# Altium PCB PCB1_1.pcbdoc
Units mil, origin at the board's own origin, x right, y up, seen from the top; angles counter-clockwise.
Board outline 3006.59 x 1637.5 mil, 4 copper layers (Top Layer, Inner1, Inner2, Bottom Layer); 46 components, 49 nets, 208 pads, 87 vias.
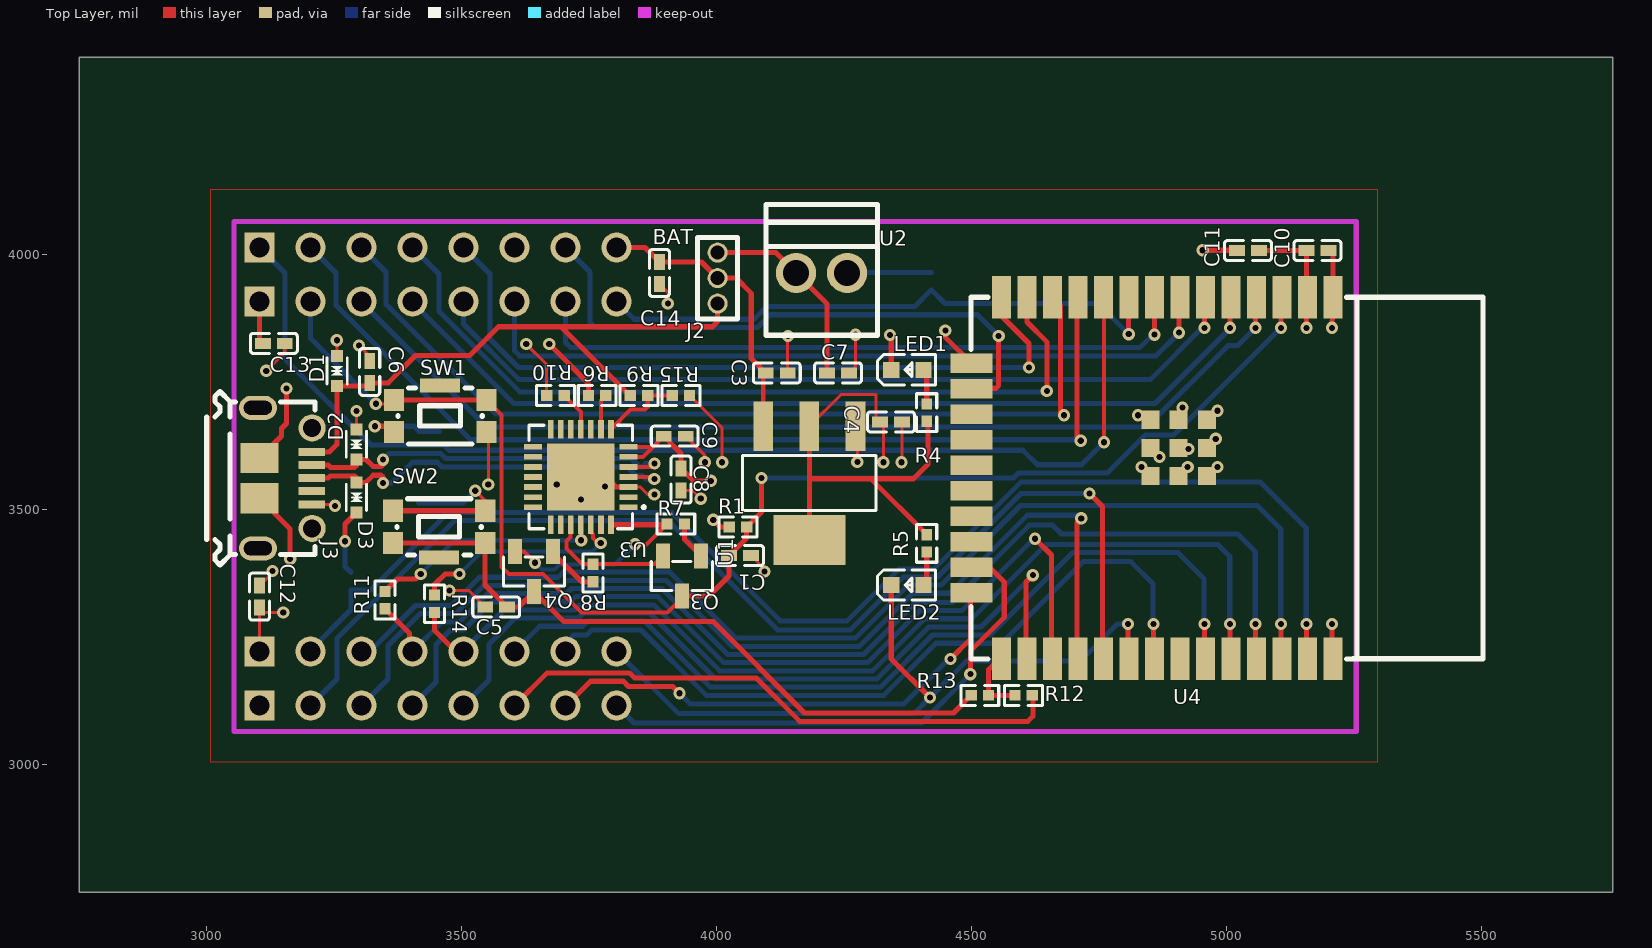
[diagram p0: Top Layer view]
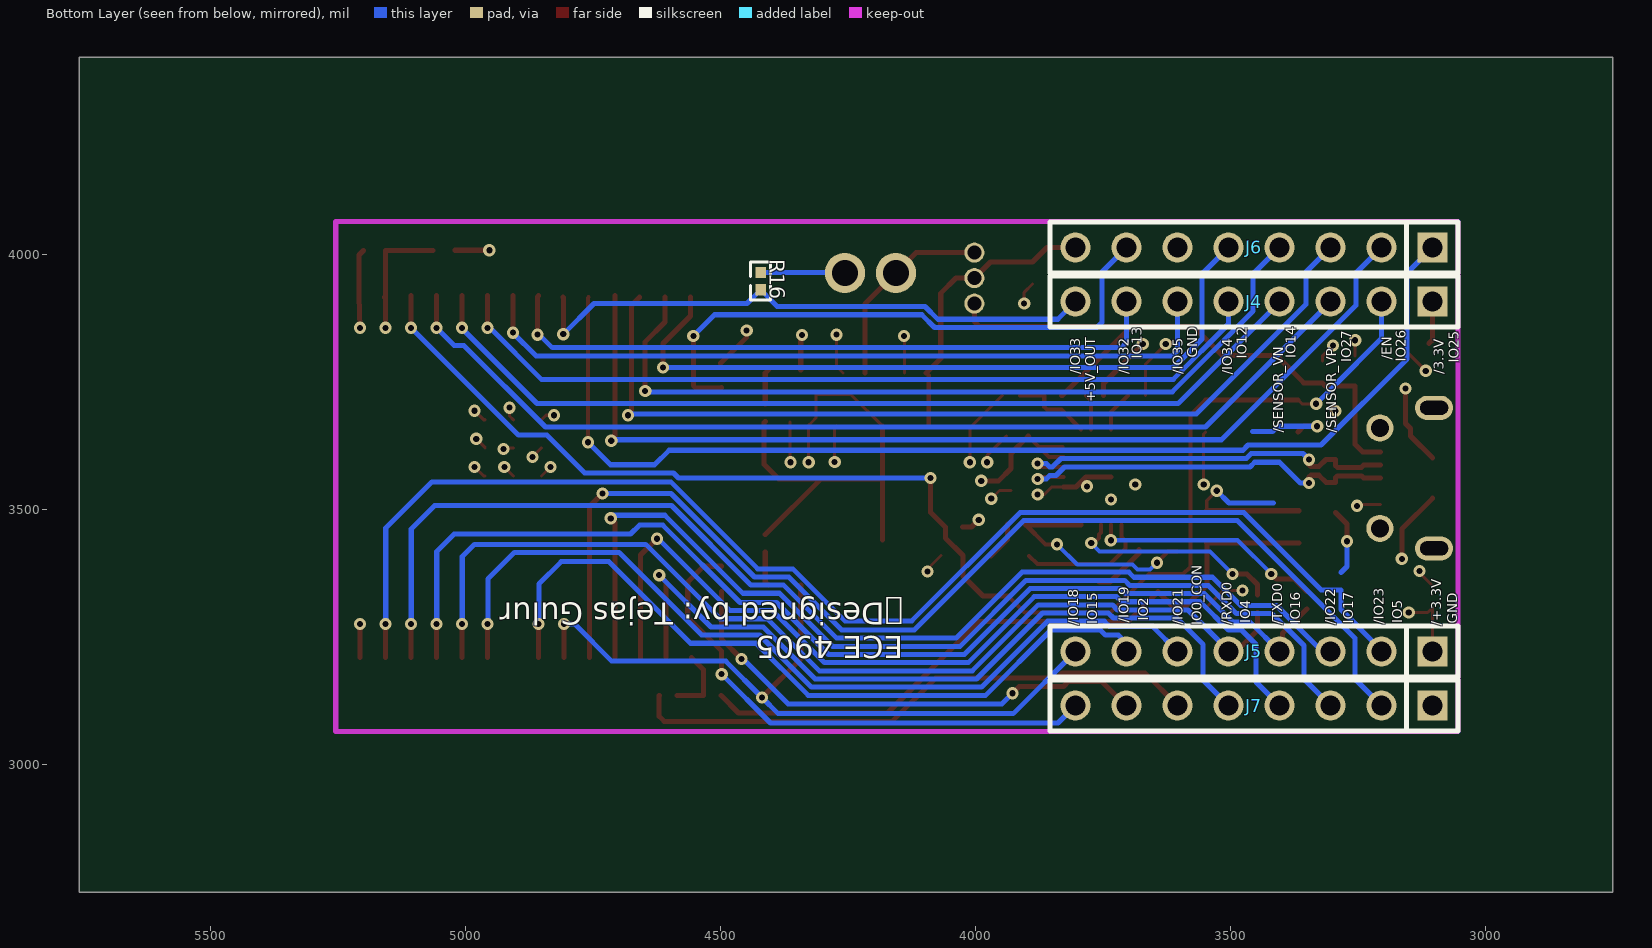
[diagram p1: Bottom Layer view, seen from below]

## Layer stack, top to bottom
Top Layer: signal copper (thickness not stored)
Dielectric: dielectric 12.6, FR-4, Dk 4.8
Inner1: signal copper (thickness not stored)
Dielectric: dielectric 12.6, FR-4, Dk 4.8
Inner2: signal copper (thickness not stored)
Dielectric: dielectric 12.6, FR-4, Dk 4.8
Bottom Layer: signal copper (thickness not stored)

## Board outline
5756.59,2750 2750,2750 2750,4387.5 5756.59,4387.5

## Components (designator, comment, footprint, x,y, rotation, side; value= is the part's Value field where it differs from the comment)
C1 "CL05B104KO5NNNC" C0402_NEW 4045.54,3410.5 r180 top
C3 "CL05A106MP5NUNC_C315248" C0402 4117.54,3768.5 r180 top
C4 "CL05A106MP5NUNC_C315248" C0402 4341.54,3672.5 r180 top
C5 "CL05B104KO5NNNC" C0402_NEW 3567.54,3309.5 r0 top
C6 "CL05B104KO5NNNC" C0402_NEW 3319.54,3770.5 r270 top
C7 "CL05A106MP5NUNC_C315248" C0402 4237.54,3768.5 r180 top
C8 "CL05A475KP5NRNC" C0402 3930.04,3559.5 r270 top
C9 "CL05B104KO5NNNC" C0402_NEW 3917.54,3644.5 r0 top
C10 "CL05A475KP5NRNC" C0402 5177.54,4008.5 r180 top
C11 "CL05B104KO5NNNC" C0402_NEW 5041.54,4008.5 r0 top
C12 "CL05B104KO5NNNC" C0402_NEW 3103.54,3330 r270 top
C13 "CL05B104KO5NNNC" C0402_NEW 3131.54,3826.5 r180 top
C14 "CL05B104KO5NNNC" C0402_NEW 3887.54,3964.5 r90 top
D1 "LESD5D5.0CT1G" SOD-523_L1.2-W0.8-LS1.6-BI 3255.54,3772.5 r270 top
D2 "LESD5D5.0CT1G" SOD-523_L1.2-W0.8-LS1.6-BI 3293.54,3628.5 r270 top
D3 "LESD5D5.0CT1G" SOD-523_L1.2-W0.8-LS1.6-BI 3293.54,3524.5 r90 top
J2 "B-2101S03P-A110" HDR-TH_3P-P1.27-V-M-1 4001.54,3954.5 r270 top
J3 "1050170001" MICRO-USB-SMD_105017-0001 3153.54,3562.2 r270 top
J4 "KH-2.54PH180-1X8P-L11.5" HDR-TH_8P-P2.54-V-M 3453.54,3908.5 r0 bottom
J5 "KH-2.54PH180-1X8P-L11.5" HDR-TH_8P-P2.54-V-M 3453.54,3222.5 r0 bottom
J6 "KH-2.54PH180-1X8P-L11.5" HDR-TH_8P-P2.54-V-M 3453.54,4014.5 r0 bottom
J7 "KH-2.54PH180-1X8P-L11.5" HDR-TH_8P-P2.54-V-M 3453.54,3116.5 r0 bottom
LED1 "LTST-C193KGKT-5A" LED0603-RD 4373.54,3774.5 r0 top
LED2 "LTST-C191KRKT" LED0603-RD 4373.54,3352.5 r0 top
Q3 "SS8050-G" SOT-23-3_L2.9-W1.3-P1.90-LS2.4-BR 3931.54,3370.5 r90 top
Q4 "SS8050-G" SOT-23-3_L2.9-W1.3-P1.90-LS2.4-BR 3641.54,3379 r90 top
R1 "0402WGF1002TCE" R0402 4041.54,3466.5 r180 top
R4 "0402WGJ0512TCE" R0402 4411.54,3690.5 r270 top
R5 "0402WGJ0561TCE" R0402 4411.54,3434.5 r90 top
R6 "0402WGF1001TCE" R0402 3765.54,3724.5 r180 top
R7 "0402WGF1002TCE" R0402 3919.54,3472.5 r0 top
R8 "0402WGF1002TCE" R0402 3757.54,3376.5 r270 top
R9 "0402WGF2212TCE" R0402 3847.54,3724.5 r0 top
R10 "0402WGF1002TCE" R0402 3683.54,3724.5 r180 top
R11 "0402WGF0000TCE" R0402 3349.54,3323 r90 top
R12 "0402WGF220JTCE" R0402 4601.54,3136.5 r180 top
R13 "0402WGF220JTCE" R0402 4515.54,3136.5 r0 top
R14 "0402WGF0000TCE" R0402 3446.54,3316 r90 top
R15 "0402WGF4752TCE" R0402 3929.54,3724.5 r180 top
R16 "0402WGF8200TCE" R0402 4420.54,3948.5 r270 bottom
SW1 "KMR221GLFS" KEY-SMD_KMR2XXGXXX 3457.54,3698.5 r0 top
SW2 "KMR221GLFS" KEY-SMD_KMR2XXGXXX 3455.54,3452.5 r180 top
U1 "AMS1117-3.3_C347222" SOT-223-4_L6.5-W3.5-P2.30-LS7.0-BR 4181.54,3552.5 r90 top
U2 "XY308-2.54-2P" CONN-TH_XY308-2.54-2P 4205.54,3964.5 r0 top
U3 "CP2102N-A02-GQFN28R" QFN-28_L5.0-W5.0-P0.50-TL-EP3.3 3733.54,3564.5 r180 top
U4 "ESP32-WROOM-32E-N16_C701343" WIFI-SMD_ESP32-WROOM-32E 4853.54,3562.5 r180 top

## Footprints (in the part's own frame and the unit in brackets; to place one, negate y for a bottom-side part, rotate by r counter-clockwise, add the part's x,y. Pads: shape width x height; smd on the part's side, far side on the other; paste and mask are expansions set on the pad)
C0402 [mm]
  rect 0.79x0.54 smd: 1(-0.545,0) 2(0.545,0)
  silkscreen extent -1.17,-0.5 1.17,0.5
C0402_NEW [mm]
  rect 0.79x0.54 smd: 1(-0.545,0) 2(0.545,0)
  silkscreen extent -1.17,-0.5 1.17,0.5
CONN-TH_XY308-2.54-2P [mm]
  round 2 hole 1.3: 1(-1.27,0) 2(1.27,0)
  silkscreen extent -2.78,-3.1 2.78,3.4
HDR-TH_3P-P1.27-V-M-1 [mm]
  round 1 hole 0.7: 1(-1.27,0) 2(0,0) 3(1.27,0)
  silkscreen extent -2.03,-1 2.03,1
HDR-TH_8P-P2.54-V-M [mm]
  rect 1.5x1.5 hole 1: 1(-8.89,0)
  round 1.5 hole 1: 2(-6.35,0) 3(-3.81,0) 4(-1.27,0) 5(1.27,0) 6(3.81,0) 7(6.35,0) 8(8.89,0)
  silkscreen extent -10.16,-1.27 10.16,1.27
KEY-SMD_KMR2XXGXXX [mm]
  rect 1x1.1 smd: 1(-2.3,0.438) 2(2.3,0.438) 3(-2.3,-1.162) 4(2.3,-1.162)
  rect 2x0.7 smd: 5(0,1.162)
  silkscreen extent -2.1,-1.76 2.1,1.04
LED0603-RD [mm]
  rect 0.8x0.8 smd: 1(-0.799,-0.003) 2(0.799,0.003)
  silkscreen extent -1.49,-0.75 1.39,0.76
MICRO-USB-SMD_105017-0001 [mm]
  rect 0.4x1.3 smd: 1(-1.3,1.33) 2(-0.65,1.33) 3(0,1.33) 4(0.65,1.33) 5(1.3,1.33)
  round 1.35 hole 0.9: 6(-2.5,1.35) 7(2.5,1.35)
  oval 1.2x1.9 hole 0.7 slot 1.4 at 90 deg: 8(3.5,-1.35) 9(-3.5,-1.35)
  rect 1.5x1.9 smd: 10(-1,-1.28) 10(1,-1.28)
  silkscreen extent -4.32,-3.9 4.32,1.5
QFN-28_L5.0-W5.0-P0.50-TL-EP3.3 [mm]
  rect 0.905x0.28 smd: 1(-2.377,1.5) 2(-2.377,1) 3(-2.377,0.5) 4(-2.377,0) 5(-2.377,-0.5) 6(-2.377,-1) 7(-2.377,-1.5) 15(2.377,-1.5) 16(2.377,-1) 17(2.377,-0.5) 18(2.377,0) 19(2.377,0.5) 20(2.377,1) 21(2.377,1.5)
  rect 0.28x0.905 smd: 8(-1.5,-2.377) 9(-1,-2.377) 10(-0.5,-2.377) 11(0,-2.377) 12(0.5,-2.377) 13(1,-2.377) 14(1.5,-2.377) 22(1.5,2.377) 23(1,2.377) 24(0.5,2.377) 25(0,2.377) 26(-0.5,2.377) 27(-1,2.377) 28(-1.5,2.377)
  rect 3.35x3.35 smd: 29(0,0)
  silkscreen extent -3.2,-2.58 2.58,2.58
R0402 [mm]
  rect 0.566x0.54 smd: 1(-0.433,0) 2(0.433,0)
  silkscreen extent -0.94,-0.5 0.94,0.5
SOD-523_L1.2-W0.8-LS1.6-BI [mm]
  rect 0.6x0.6 smd: 1(-0.75,0) 2(0.75,0)
  silkscreen extent -0.65,-0.5 0.65,0.5
SOT-23-3_L2.9-W1.3-P1.90-LS2.4-BR [mm]
  rect 1.25x0.7 smd: 1(1,-0.95) 2(1,0.95) 3(-1,0)
  silkscreen extent -0.73,-1.53 0.73,1.53
SOT-223-4_L6.5-W3.5-P2.30-LS7.0-BR [mm]
  rect 2.47x0.98 smd: 1(2.835,-2.3) 2(2.835,0) 3(2.835,2.3)
  rect 2.47x3.6 smd: 4(-2.835,0)
  silkscreen extent -1.37,-3.33 1.37,3.33
WIFI-SMD_ESP32-WROOM-32E [mm]
  rect 0.95x2.1 smd: 1(-9.003,-9) 2(-7.733,-9) 3(-6.463,-9) 4(-5.193,-9) 5(-3.923,-9) 6(-2.653,-9) 7(-1.383,-9) 8(-0.113,-9) 9(1.157,-9) 10(2.427,-9) 11(3.697,-9) 12(4.967,-9) 13(6.237,-9) 14(7.507,-9) 25(7.507,9) 26(6.237,9) 27(4.967,9) 28(3.697,9) 29(2.427,9) 30(1.157,9) 31(-0.113,9) 32(-1.383,9) 33(-2.653,9) 34(-3.923,9) 35(-5.193,9) 36(-6.463,9) 37(-7.733,9) 38(-9.003,9)
  rect 2.1x0.95 smd: 15(9.003,-5.715) 16(9.003,-4.445) 17(9.003,-3.175) 18(9.003,-1.905) 19(9.003,-0.635) 20(9.003,0.635) 21(9.003,1.905) 22(9.003,3.175) 23(9.003,4.445) 24(9.003,5.715)
  rect 0.9x0.9 smd: 39(-2.722,-0.1) 39(-2.722,-2.9) 39(-2.722,-1.5) 39(-1.322,-0.1) 39(-1.322,-1.5) 39(-1.322,-2.9) 39(0.078,-0.1) 39(0.078,-1.5) 39(0.078,-2.9)
  silkscreen extent -16.48,-9 9.02,9.02

## Via types
v1: diameter 24.02, hole 12.01, Top Layer to Bottom Layer, 87 vias

## Nets (pads, with @x,y where several pads share a name; then routed paths per layer and width w, separated by ;. In a path a pad name is that pad's centre, name@x,y a point inside that pad or via, vN(x,y) a via of type N, cw(c..) or ccw(c..) an arc to the next point about the centre after c; other vN are vias at no path point)
$1N8813: R6.1 U3.9 | length 70.4
  Top Layer w8: U3.9 3772.91,3714.83 R6.1
$1N8814: R10.1 U3.11 | length 80.1
  Top Layer w8: R10.1 3733.54,3691.54 U3.11
$1N8818: R9.2 R15.2 U3.8 | length 160.9
  Top Layer w8: U3.8 3830.99,3696.5 3859.54,3696.5 3864.58,3701.54 R9.2 R15.2
$1N8830: U3.27
$1N8848: Q3.1 R7.2 | length 76
  Top Layer w10: R7.2 3936.58,3442.23 Q3.1
$1N8884: LED1.2 R4.1 | length 69.8
  Top Layer w10: LED1.2 4411.54,3768.11 R4.1
$1N8888: LED2.2 R5.1 | length 67.5
  Top Layer w10: LED2.2 4411.54,3359.16 R5.1
$1N38866: Q4.1 R8.2 | length 109.2
  Top Layer w10: Q4.1@3678.94,3421.87 3678.94,3415.1 3735.54,3358.5 3756.58,3358.5 R8.2
+3.3V: C4.2 C8.1 C9.1 C10.2 C11.2 C12.2 C13.2 J4.1 J5.1 R1.2 R4.2 R5.2 R6.2 U1.2 U1.4 U3.6 U3.7 U4.2 | length 1917.7
  Top Layer w6: J5.1 C12.2 3113.08,3299 v1(3150.04,3299) ; U1.2 4243.43,3726 4312.04,3726 4312.04,3680.54 C4.2 4326.54,3666.04 v1(4326.54,3593.5)
  Top Layer w8: U3.6 3855.45,3603.87 3875.14,3623.56 ; U3.7@3829.14,3623.56 3875.14,3623.56 ; C9.1 3875.14,3623.56
  Top Layer w10: J4.1 3103.54,3833.04 C13.2 ; v1(3671.54,3825) 3748.5,3748.04 R6.2 ; C9.1 3930.04,3610.54 C8.1 3954,3557 v1(3988.04,3557) ; v1(3993.04,3480.5) 4007.04,3466.5 R1.2 ; U1.4 4181.54,3561.12 ; U1.2 4181.54,3561.12 ; R5.2 4301.96,3561.12 ; R4.2 4414.04,3670.96 4414.04,3589.5 4385.67,3561.12 4301.96,3561.12 ; C11.2 C10.2 U4.2@5156.08,3918.84 ; v1(5155.97,3856.93) U4.2@5156.08,3918.84 ; U4.2 5156.08,3918.72 U4.2@5156.08,3918.84 ; 4181.54,3561.12 4301.96,3561.12
+5V: C3.2 C14.2 J2.2 J6.8 U1.3 | length 575.6
  Top Layer w8: U1.3 4090.99,3763.41 C3.2
  Top Layer w10: J6.8 3859,4014.5 C14.2 3970.08,3985.96 J2.2 4037.54,3954.5 4067.54,3924.5 4067.54,3797.04 C3.2
+5V_BAT: C7.2 J2.1 U2.1 | length 391.6
  Top Layer w10: J2.1 4115.54,4004.5 U2.1 4216.08,3903.96 C7.2
+5V_VBUS: C6.2 D1.2 J2.3 J3.1 R9.1 | length 1195.5
  Top Layer w10: J3.1 3240.42,3613.38 3255.54,3628.5 D1.2 3313.48,3742.97 C6.2 3356.08,3749.04 3409.54,3802.5 3515.54,3802.5 3572.04,3859 3694.8,3859 ; R9.1 3829.3,3724.5 3694.8,3859 ; J2.3 4001.54,3869 3991.54,3859 3694.8,3859
DTR: Q4.2 R7.1 U3.28 | length 458.5
  Top Layer w8: Q4.2 3621.67,3418.37 v1(3643.54,3396.5) ; v1(3839.54,3432.5) 3862.5,3432.5 R7.1@3900.9,3470.9
  Top Layer w10: U3.28 3900.9,3470.9 R7.1
  Bottom Layer w8: v1(3643.54,3396.5) 3657.16,3382.88 3681.93,3382.88 3691.93,3392.88 3799.93,3392.88 v1(3839.54,3432.5)
EN: C1.2 J4.2 Q3.3 R1.1 SW1.1 SW1.2 U4.3 | length 2745.5
  Top Layer w6: v1(3331.54,3708) 3359.24,3708 SW1.1
  Top Layer w8: SW1.2@3548.79,3715.75 3578.11,3686.44 3578.11,3388.44 3592.31,3374.24 3659.46,3374.24 3734.7,3299 3902.91,3299 Q3.3@3931.54,3327.63
  Top Layer w10: SW1.1 SW1.2 ; Q3.3 3984.67,3331.13 4024.08,3370.54 C1.2 4058.58,3445 R1.1 4087.54,3495.46 v1(4087.54,3562.5) ; v1(5105.97,3856.93) U4.3@5105.97,3919.84
  Bottom Layer w10: J4.2 3203.54,3836.5 3251.54,3788.5 3251.54,3788 v1(3331.54,3708) ; v1(4087.54,3562.5) 4581.66,3562.5 4591.66,3572.5 4765.54,3572.5 4839.54,3646.5 4895.54,3646.5 v1(5105.97,3856.93)
GND: C1.1 C3.1 C4.1 C5.1 C6.1 C7.1 C8.2 C9.2 C10.1 C11.1 C12.1 C13.1 C14.1 D1.1 D2.1 D3.1 J3.5 J3.6 J3.7 J3.8 J3.9 J3.10 J6.6 J7.1 LED1.1 R10.2 R15.1 R16.1 SW1.3 SW1.4 SW2.3 SW2.4 U1.1 U2.2 U3.3 U3.29 U4.1 U4.15 U4.38 U4.39 | length 3184.2
  Top Layer w6: C12.1 3129.04,3376.96 v1(3129.04,3380) ; v1(3116.78,3772.67) 3153,3808.89 C13.1 ; J3.5 3248.54,3511 v1(3251.54,3508) ; v1(3255.04,3832.5) 3255.54,3832 D1.1 ; D2.1 v1(3293.54,3694) ; v1(3298.54,3822.5) 3319.54,3801.5 C6.1 ; v1(3476.04,3342) 3513.58,3342 C5.1 ; v1(3526.54,3537.5) 3546.09,3517.95 SW2.3 ; SW1.4 3552.09,3648.75 v1@3552.09,3550.05 ; v1(3626.54,3825) 3666.5,3785.04 R10.2 ; U3.3 3850.02,3544.82 3864.54,3530.31 v1(3877.54,3530.31) ; C14.1 3904.04,3926.54 v1(3904.04,3904.5) ; C8.2 3952.5,3538.04 v1(3968.54,3522) ; C9.2 3976.54,3606.96 v1(3976.54,3593.5) ; R15.1 4010.54,3660.54 v1(4010.54,3593.5) ; C1.1 4093.54,3383.96 v1(4093.54,3379) ; C3.1 4139,3840.46 v1(4139.54,3841) ; C7.1 4272.04,3781.54 v1(4272.04,3843.5) ; U1.1 4275.54,3660.66 v1(4275.54,3594) ; v1(4362.14,3593.5) 4363,3594.37 C4.1 ; v1(4825.54,3685.5) 4841.63,3685.5 U4.39@4850.45,3676.68 ; v1(4832.62,3584.15) 4832.73,3584.15 U4.39@4850.45,3566.43 ; U4.39@4850.45,3621.55 4868.05,3603.95 v1(4868.05,3603.83) ; U4.39@4905.57,3566.43 4923.17,3584.03 v1(4923.17,3584.15) ; U4.39@4905.57,3621.57 4922.48,3621.57 v1(4924.54,3619.5) ; U4.39@4905.57,3676.68 4913.04,3684.14 v1(4913.04,3700.5) ; U4.39@4960.69,3566.43 4963.78,3566.43 v1(4981.5,3584.15) ; U4.39@4960.69,3621.55 4978.29,3639.15 v1(4978.29,3639.27) ; U4.39@4960.69,3676.68 4963.78,3676.68 v1(4981.5,3694.39)
  Top Layer w10: J3.10@3103.15,3522.83 3163.54,3462.44 v1(3163.54,3404) ; J3.10@3103.15,3601.57 3146.54,3644.96 3146.54,3659.5 3156.54,3669.5 v1(3156.54,3738) ; v1(3271.04,3438.5) 3271.04,3472.47 D3.1 ; v1(3329.54,3664) 3355.74,3664 SW1.3 ; SW2.4 SW2.3 ; U3.29 3782.65,3564.5 3802.33,3544.82 U3.3 ; v1(4339.54,3843) 4342.07,3840.47 LED1.1 ; v1(4448.04,3851.5) 4448.04,3838.57 U4.15 ; v1(4952.54,4009) 5019.58,4009 C11.1 ; C10.1 5207.97,3999.53 U4.1@5207.97,3918.84 ; U4.38@5205.97,3211.16 v1(5205.97,3276.07) ; v1(5205.97,3856.93) U4.1@5207.97,3918.84 ; U4.1 U4.1@5207.97,3918.84
  Bottom Layer w10: v1(3271.04,3438.5) 3271.04,3389.04 3283.04,3377.04 ; v1(3329.54,3664) 3406.45,3664 3416.86,3653.59 3456.23,3653.59 ; 3415.36,3513.41 3502.45,3513.41 v1(3526.54,3537.5) ; U2.2 4256.58,3965.54 R16.1
  other v1: 3733.54,3520.17 3780.74,3546.19 3552.04,3550 3686.34,3549.83
IO0: R12.2 R13.2 U4.25 | length 135.3
  Top Layer w10: U4.25@4555.97,3210.16 4532.58,3186.78 R13.2 R12.2
IO0_BTN: C5.2 Q4.3 R13.1 SW2.1 SW2.2 | length 1359.8
  Top Layer w10: SW2.2 SW2.1 3545.54,3434.7 3545.54,3352.96 C5.2 3611.41,3309.5 Q4.3 3700.17,3281 3993.04,3281 4172.04,3102 4464,3102 R13.1
IO0_CON: J7.6 R12.1 | length 1127.4
  Top Layer w10: J7.6 3667.54,3180.5 3829.04,3180.5 3839.04,3170.5 4077.54,3170.5 4162.54,3085.5 4609.54,3085.5 4619.54,3095.5 4619.54,3135.54 R12.1
IO2: J7.7 U4.24 | length 977.2
  Top Layer w10: J7.7 3705.04,3116.5 3752.54,3164 3817.04,3164 3827.04,3154 3913.54,3154 v1(3927.04,3140.5) ; v1(4458.04,3207.5) 4497.11,3246.57 U4.24@4497.11,3339.49
  Bottom Layer w10: v1(3927.04,3140.5) 3948.04,3119.51 4366.55,3119.51 4454.54,3207.5 v1(4458.04,3207.5)
IO4: J7.5 U4.26 | length 1536.5
  Top Layer w10: U4.26@4605.97,3211.16 4605.97,3358.43 v1(4619.54,3372)
  Bottom Layer w10: J7.5 3553.54,3166.5 3553.54,3236.5 3604.93,3287.88 3728.93,3287.88 3738.93,3297.88 3868.16,3297.88 3997.54,3168.5 4313.54,3168.5 4415.54,3270.5 4518.04,3270.5 v1(4619.54,3372)
IO5: J7.2 U4.29 | length 2254.9
  Top Layer w10: v1(4730.54,3532) 4755.97,3506.57 U4.29@4755.97,3211.16
  Bottom Layer w10: J7.2 3255.54,3168.5 3255.54,3248.5 3485.91,3478.87 3905.17,3478.87 4119.54,3264.5 4261.54,3264.5 4365.54,3368.5 4432.92,3368.5 4596.42,3532 v1(4730.54,3532)
IO12: J6.5 U4.14 | length 1441
  Top Layer w10: U4.14 4557.97,3880.07 4612.04,3826 v1(4612.04,3779)
  Bottom Layer w10: J6.5 3555.54,3962.5 3555.54,3834.86 3611.41,3779 v1(4612.04,3779)
IO13: J6.7 U4.16 | length 1158.5
  Top Layer w10: U4.16@4497.11,3739.49 4498.11,3738.5 4547.54,3738.5 4552.54,3743.5 v1(4552.54,3841)
  Bottom Layer w10: J6.7 3751.54,3966.5 3751.54,3867.82 3761.54,3857.82 4078.97,3857.82 4080.91,3859.75 4079.9,3857.82 4104.59,3882.5 4511.04,3882.5 v1(4552.54,3841)
IO14: J6.4 U4.13 | length 1604.1
  Top Layer w10: U4.13 4607.97,3868.5 4647.04,3829.43 v1(4647.04,3733)
  Bottom Layer w10: J6.4 3455.54,3962.5 3455.54,3889.61 3613.66,3731.49 4645.54,3731.49 v1(4647.04,3733)
IO15: J7.8 U4.23 | length 1034.6
  Top Layer w10: v1(4497.04,3178) 4497.04,3222.83 4563.54,3289.33 4563.54,3358.5 4532.55,3389.49 U4.23@4497.11,3389.49
  Bottom Layer w10: J7.8 3837.74,3082.3 4401.34,3082.3 v1(4497.04,3178)
IO16: J7.4 U4.27 | length 1753
  Top Layer w10: v1(4624.04,3443.5) 4655.97,3411.57 U4.27@4655.97,3210.16
  Bottom Layer w10: J7.4 3449.54,3162.5 3449.54,3236.36 3477.69,3264.5 3503.54,3264.5 3558.93,3319.88 3712.93,3319.88 3722.93,3329.88 3884.16,3329.88 4013.54,3200.5 4295.54,3200.5 4397.54,3302.5 4480.38,3302.5 4621.38,3443.5 v1(4624.04,3443.5)
IO17: J7.3 U4.28 | length 1989.4
  Top Layer w10: U4.28@4705.97,3211.16 4705.97,3474.93 v1(4714.54,3483.5)
  Bottom Layer w10: J7.3 3355.54,3168.5 3355.54,3234.04 3418,3296.5 3487.54,3296.5 3542.93,3351.88 3696.93,3351.88 3706.93,3361.88 3900.16,3361.88 4029.54,3232.5 4279.54,3232.5 4383.54,3336.5 4455.54,3336.5 4608.54,3489.5 4708.54,3489.5 v1(4714.54,3483.5)
IO18: J5.8 LED2.1 U4.30 | length 1442.1
  Top Layer w10: LED2.1 4342.07,3207.89 v1(4417.75,3132.21) ; U4.30@4805.97,3211.16 v1(4805.97,3276.07)
  Bottom Layer w10: J5.8 3925.54,3100.5 4386.04,3100.5 v1(4417.75,3132.21) 4489.05,3203.51 4712.55,3203.51 4785.11,3276.07 v1(4805.97,3276.07)
IO19: J5.7 U4.31 | length 1502.1
  Top Layer w10: U4.31@4855.97,3211.16 v1(4855.97,3276.07)
  Bottom Layer w10: J5.7 3703.54,3238.5 3719.54,3254.5 3744.92,3254.5 3754.92,3264.5 3851.54,3264.5 3979.54,3136.5 4327.54,3136.5 4429.54,3238.5 4558.04,3238.5 4718.04,3398.5 4811.54,3398.5 4855.54,3354.5 4855.54,3276.5 v1(4855.97,3276.07)
IO21: J5.6 U4.33 | length 1720.2
  Top Layer w10: U4.33@4955.97,3211.16 v1(4955.97,3276.07)
  Bottom Layer w10: J5.6 3652.93,3271.88 3736.93,3271.88 3746.93,3281.88 3858.16,3281.88 3987.54,3152.5 4320.92,3152.5 4422.92,3254.5 4421.19,3252.15 4423.54,3254.5 4536.04,3254.5 4698.04,3416.5 4903.54,3416.5 4955.54,3364.5 4955.54,3276.5 v1(4955.97,3276.07)
IO22: J5.3 U4.36 | length 2298.2
  Top Layer w10: U4.36@5105.97,3211.16 v1(5105.97,3276.07)
  Bottom Layer w10: J5.3 3319.54,3222.5 3409.54,3312.5 3479.54,3312.5 3534.93,3367.88 3688.93,3367.88 3698.93,3377.88 3908.16,3377.88 4037.54,3248.5 4271.54,3248.5 4375.54,3352.5 4439.54,3352.5 4595.54,3508.5 5059.54,3508.5 5105.54,3462.5 5105.54,3276.5 v1(5105.97,3276.07)
IO23: J5.2 U4.37 | length 2580.7
  Top Layer w10: U4.37@5155.97,3211.16 v1(5155.97,3276.07)
  Bottom Layer w10: J5.2 3203.54,3225 3283.04,3304.5 3283.04,3342.96 3321.5,3342.96 3473.41,3494.87 3911.8,3494.87 4124.17,3282.5 4255.54,3282.5 4357.54,3384.5 4426.29,3384.5 4596.8,3555.01 5065.04,3555.01 5155.54,3464.5 5155.54,3276.5 v1(5155.97,3276.07)
IO25: J6.1 U4.10 | length 2234
  Top Layer w8: U4.10 4759.04,3915.76 v1(4759.04,3632.5)
  Bottom Layer w10: J6.1 3153.54,3964.5 3153.54,3795.5 3322.04,3627 3465.04,3627 3475.04,3617 4600.04,3617 4628.54,3588.5 4715.04,3588.5 v1(4759.04,3632.5)
IO26: J6.2 U4.11 | length 1991.5
  Top Layer w10: U4.11@4705.97,3919.84 4705.97,3643.07 v1(4713.54,3635.5)
  Bottom Layer w10: J6.2 3253.54,3964.5 3253.54,3901.19 3517.23,3637.5 4711.54,3637.5 v1(4713.54,3635.5)
IO27: J6.3 U4.12 | length 1791
  Top Layer w10: U4.12 4674.04,3900.76 4674.04,3692 v1(4680.54,3685.5)
  Bottom Layer w10: J6.3 3351.54,3966.5 3351.54,3903.19 3566.73,3688 4678.04,3688 v1(4680.54,3685.5)
IO32: J4.7 U4.8 | length 1332.9
  Top Layer w10: U4.8@4855.97,3919.84 4858.04,3917.76 v1(4858.04,3843.5)
  Bottom Layer w10: J4.7@3703.54,3914.5 3703.54,3827.99 3713.54,3817.99 4829.04,3817.99 4854.54,3843.5 v1(4858.04,3843.5)
IO33: J4.8 R16.2 U4.9 | length 1150.7
  Top Layer w10: v1@4807.47,3844.57 4807.47,3916.34 U4.9
  Bottom Layer w10: J4.8 3838.23,3873.82 4073.28,3873.82 4098.46,3899 4388.08,3899 R16.2 4447.54,3904.46 4747.58,3904.46 v1(4807.54,3844.5)
IO34: J4.5 U4.6 | length 1646.2
  Top Layer w10: v1(4955.97,3856.93) U4.6@4955.97,3919.84
  Bottom Layer w10: J4.5 3503.54,3864.24 3611.78,3756 4850.54,3756 4951.47,3856.93 v1(4955.97,3856.93)
IO35: J4.6 U4.7 | length 1494.6
  Top Layer w10: v1(4906.04,3847.5) U4.7@4906.04,3919.76
  Bottom Layer w10: J4.6 3603.54,3811.99 3613.54,3801.99 4861.04,3801.99 4906.04,3847 v1(4906.04,3847.5)
RTS: Q3.2 R8.1 U3.24 | length 257.8
  Top Layer w8: U3.24@3713.35,3470.9 3712.85,3470.4 3712.85,3447.09 3705.04,3439.28 3705.04,3424 3735.5,3393.54 R8.1@3756.54,3393.54 ; R8.1 3877.81,3393.54 Q3.2
RXD: R11.2 U3.25 | length 456.7
  Top Layer w8: U3.25 3734.04,3470.4 v1(3734.04,3440.5)
  Top Layer w10: R11.2 3374,3364.5 3409.54,3364.5 v1(3419.54,3374.5)
  Bottom Layer w8: v1(3419.54,3374.5) 3485.54,3440.5 v1(3734.04,3440.5)
RXD0: J5.5 R14.1 U4.34 | length 2016.1
  Top Layer w10: R14.1 3446.54,3264 3488.04,3222.5 J5.5 ; U4.34@5005.97,3211.16 v1(5005.97,3276.07)
  Bottom Layer w10: J5.5 3503.54,3228.1 3507.14,3228.1 3582.93,3303.88 3720.93,3303.88 3730.93,3313.88 3876.16,3313.88 4005.54,3184.5 4305.54,3184.5 4407.54,3286.5 4500.04,3286.5 4646.04,3432.5 4981.54,3432.5 5005.54,3408.5 5005.54,3276.5 v1(5005.97,3276.07)
SENSOR_VN: J4.4 U4.5 | length 1809.9
  Top Layer w10: v1(5005.97,3856.93) U4.5@5005.97,3919.84
  Bottom Layer w10: J4.4@3403.54,3907 3602.04,3708.51 4859.05,3708.51 5005.97,3855.43 v1(5005.97,3856.93)
SENSOR_VP: J4.3 U4.4 | length 1997.4
  Top Layer w10: v1(5055.97,3856.93) U4.4@5055.97,3919.84
  Bottom Layer w10: J4.3@3303.54,3907.5 3548.54,3662.5 4842.54,3662.5 5002.54,3822.5 5021.54,3822.5 v1(5055.97,3856.93)
TXD: R14.2 U3.26 | length 427.3
  Top Layer w8: U3.26 3753.22,3455.73 3757.54,3451.41 3757.54,3444.5 3767.04,3435 v1(3772.54,3435)
  Top Layer w10: R14.2 3446.54,3353.5 3467.54,3374.5 v1(3495.54,3374.5)
  Bottom Layer w8: v1(3495.54,3374.5) 3539.55,3418.51 3756.05,3418.51 v1(3772.54,3435)
TXD0: J5.4 R11.1 U4.35 | length 2196.4
  Top Layer w10: R11.1 3397.54,3257.96 3397.54,3228.5 J5.4 ; U4.35@5055.97,3211.16 v1(5055.97,3276.07)
  Bottom Layer w10: J5.4 3461.54,3280.5 3495.54,3280.5 3550.93,3335.88 3705.21,3335.88 3715.21,3345.88 3892.16,3345.88 4021.54,3216.5 4287.54,3216.5 4389.54,3318.5 4461,3318.5 4612.5,3470 4658.04,3470 4675.54,3452.5 5021.54,3452.5 5055.54,3418.5 5055.54,3276.5 v1(5055.97,3276.07)
USB_DN: D2.2 J3.2 U3.5 | length 776.9
  Top Layer w8: U3.5 3871.23,3584.19 v1(3878.04,3591)
  Top Layer w10: J3.2 3238.49,3587.8 3242.79,3583.5 3290.01,3583.5 3293.54,3587.04 D2.2 3312.35,3598.97 3326.33,3585 3342.01,3585 3345.54,3588.54 v1(3345.54,3598.5)
  Bottom Layer w10: v1(3345.54,3598.5) 3357.55,3610.51 3458.91,3610.51 3468.42,3601 3832.04,3601 3848.79,3584.25 3853.79,3584.25 3860.54,3591 v1(3878.04,3591)
USB_DP: D3.2 J3.3 U3.4 | length 785.8
  Top Layer w8: U3.4 3873.54,3564.5 v1(3877.54,3560.5)
  Top Layer w10: J3.3 3238.49,3562.2 3242.79,3566.5 3290.01,3566.5 3293.54,3562.96 D3.2 3312.35,3554.03 3326.33,3568 3342.01,3568 3345.54,3564.46 v1(3345.54,3552.5)
  Bottom Layer w10: v1(3345.54,3552.5) 3362.55,3552.5 3403.56,3593.51 3451.87,3593.51 3461.37,3584 3824.99,3584 3841.74,3567.25 3853.79,3567.25 3860.54,3560.5 v1(3877.54,3560.5)
"": J3.4 SW1.5 SW2.5 U3.1 U3.2 U3.10 U3.12 U3.13 U3.14 U3.15 U3.16 U3.17 U3.18 U3.19 U3.20 U3.21 U3.22 U3.23 U4.17 U4.18 U4.19 U4.20 U4.21 U4.22 U4.32

## Polygon pours and split planes (outlines as drawn)
GND on Inner1 (solid, remove dead copper, pour order 0): 3003.54,3003.5 5295.54,3003.5 5295.54,4127 3003.54,4127
+3.3V on Inner2 (solid, remove dead copper, pour order 1): 3007.04,3000 5292.04,3000 5292.04,4137.5 3007.04,4137.5
GND on Top Layer (solid, remove dead copper, pour order 2): 3006.54,3006 5296.04,3006 5296.04,4127.5 3006.54,4127.5

## Keep-outs
Board Outline Layer:
  lines w10 net "": 3053.54,3065.5 5253.54,3065.5 5253.54,4065.5 3053.54,4065.5 3053.54,3065.5

## Silkscreen, mask and mechanical layers (free items; w line width, h text height)
Top Silkscreen Layer:
  text "BAT" at 3874.05,4020.49 h29.2
Bottom Silkscreen Layer:
  text "GND" at 3564.88,3797.84 h19.47 r270
  text "IO14" at 3371.88,3796.98 h19.47 r270
  text "IO12" at 3467.88,3796.48 h19.47 r270
  text "IO13" at 3673.88,3796.48 h19.47 r270
  text "/EN" at 3183.38,3794.34 h19.47 r270
  text "IO26" at 3156.38,3790.48 h19.47 r270
  text "IO27" at 3262.88,3788.98 h19.47 r270
  text "IO25" at 3052.38,3788.48 h19.47 r270
  text "/3.3V" at 3081.38,3766.13 h19.47 r270
  text "/IO35" at 3593.38,3765.63 h19.47 r270
  text "/IO32" at 3698.88,3765.63 h19.47 r270
  text "/IO33" at 3793.88,3766.13 h19.47 r270
  text "/IO34" at 3496.38,3765.13 h19.47 r270
  text "+5V_OUT" at 3764.88,3710.92 h19.47 r270
  text "/SENSOR_VP" at 3291.88,3650.85 h19.47 r270
  text "/SENSOR_VN" at 3396.38,3651.35 h19.47 r270
  text "ECE 4905 /  Designed by: Tejas Gulur" at 4141.28,3317.81 h43.41 r180
  text "IO2" at 3661.2,3283.11 h19.47 r270
  text "/IO19" at 3699.38,3279.13 h19.47 r270
  text "IO5" at 3162.63,3277.54 h19.47 r270
  text "IO4" at 3461.13,3278.04 h19.47 r270
  text "IO17" at 3259.13,3277.18 h19.47 r270
  text "IO16" at 3363.13,3276.68 h19.47 r270
  text "GND" at 3055.38,3276.34 h19.47 r270
  text "/IO23" at 3199.38,3275.63 h19.47 r270
  text "IO15" at 3761.13,3275.68 h19.47 r270
  text "/IO22" at 3294.38,3275.13 h19.47 r270
  text "/TXD0" at 3398.38,3274.63 h19.47 r270
  text "/RXD0" at 3497.38,3274.63 h19.47 r270
  text "/IO21" at 3593.38,3275.13 h19.47 r270
  text "/IO18" at 3798.38,3274.13 h19.47 r270
  text "/+3.3V" at 3085.88,3272.77 h19.47 r270
  text "IO0_CON" at 3555.38,3273.42 h19.47 r270